# Altium PCB STM32_ESP.pcbdoc
Units mm, origin at the board's own origin, x right, y up, seen from the top; angles counter-clockwise.
Board outline 70 x 50 mm, 2 copper layers (Top Layer, Bottom Layer); 57 components, 37 nets, 195 pads, 2 vias.
Unrouted connection lines stored in the file: 107.
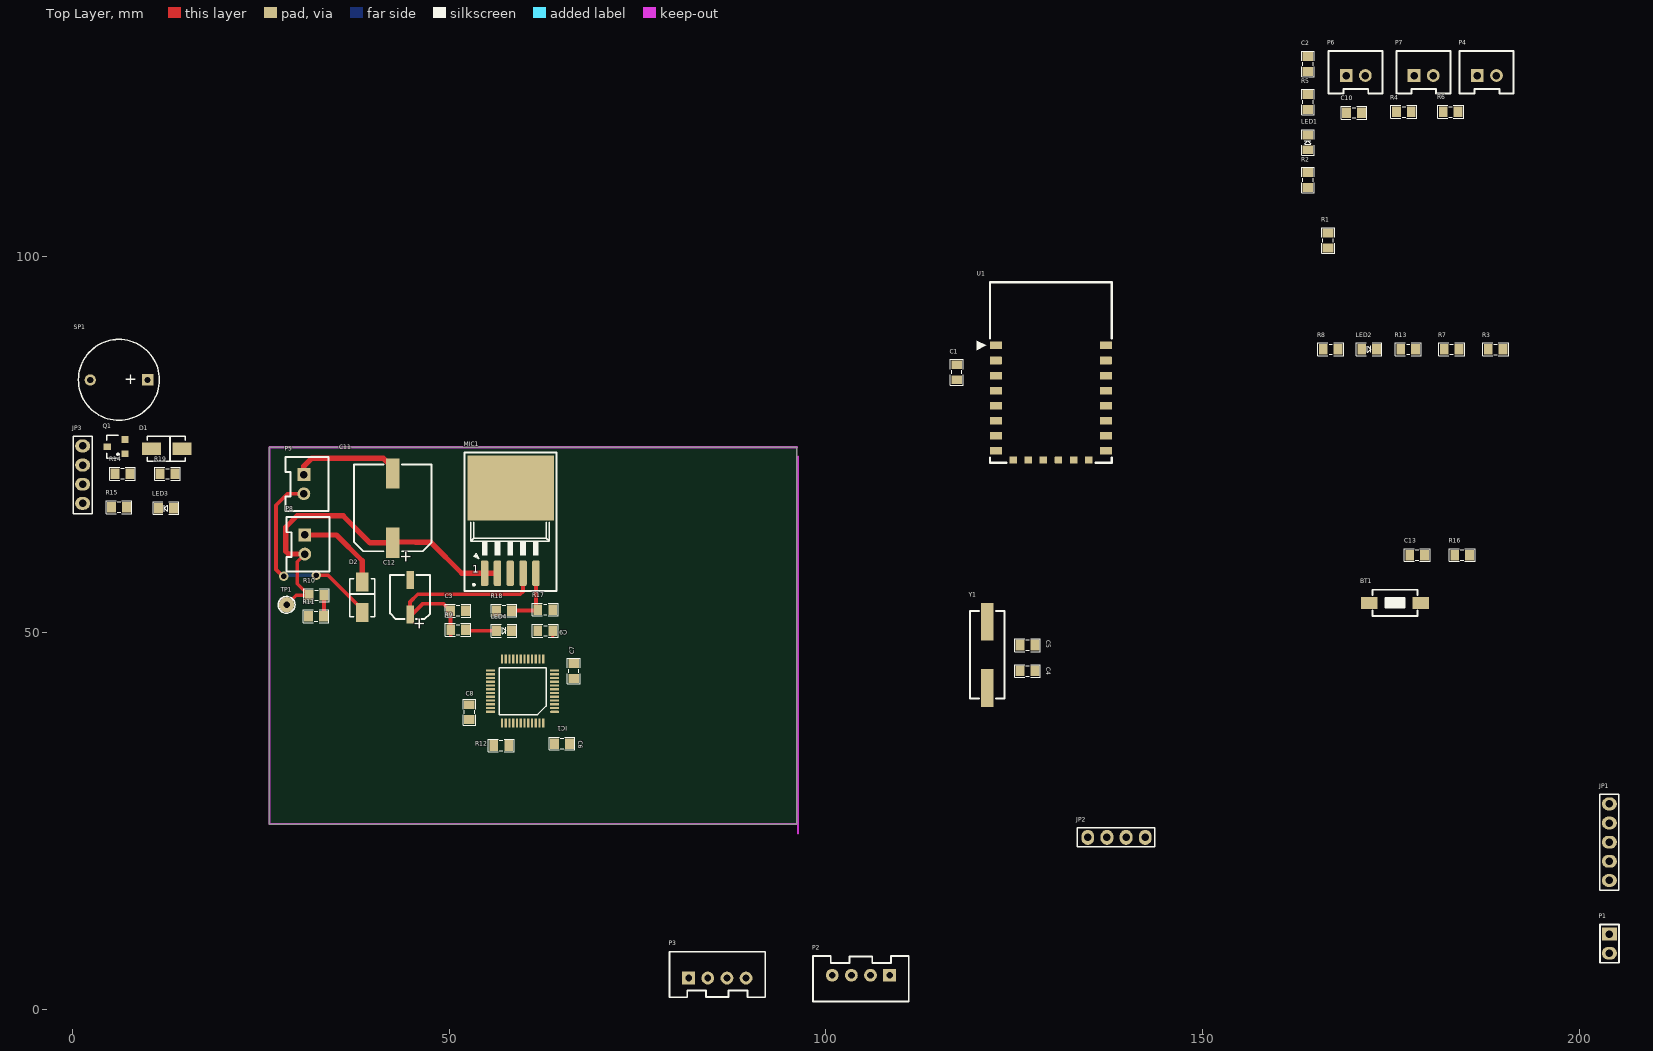
[diagram p0: Top Layer view]
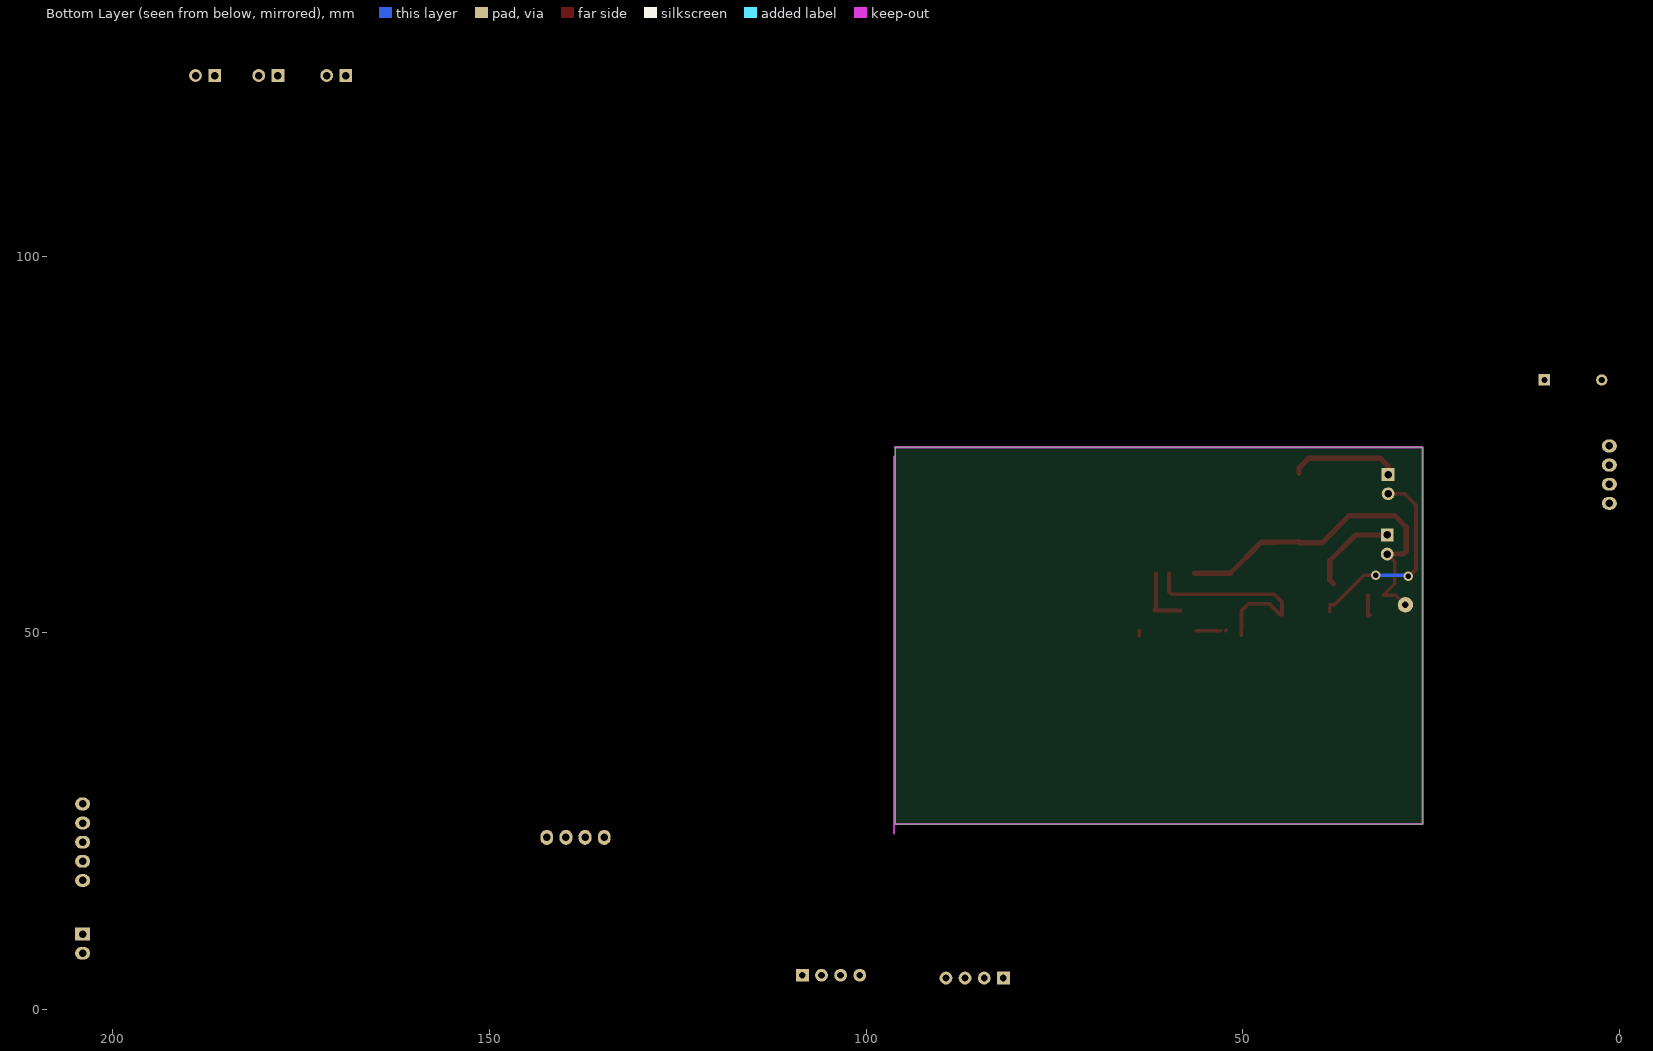
[diagram p1: Bottom Layer view, seen from below]

## Layer stack, top to bottom
Top Solder: solder mask 0.0102, Solder Resist, Dk 3.5
Top Layer: signal copper 0.0356
Dielectric 1: dielectric 0.32, FR-4, Dk 4.8
Bottom Layer: signal copper 0.0356
Bottom Solder: solder mask 0.0102, Solder Resist, Dk 3.5

## Board outline
26.162,24.638 96.162,24.638 96.162,74.638 26.162,74.638

## Design rules (kind name [scope] priority, off if disabled: settings)
Clearance [All] p1: gap=0.254 ignorepadtopadclearanceinfootprint=FALSE except(0.3: Arc-Hole Track-Hole SMDPad-Hole THPad-Hole Via-Hole Fill-Hole Poly-Hole Region-Hole Text-Hole)
PolygonConnect [All] p1: connectstyle=Relief reliefconductorwidth=0.254 reliefentries=4 polygonreliefangle="90 Angle" airgapwidth=0.254
RoutingVias [All] p1: holewidth=0.7 width=1.1 viastyle="Through Hole" minholewidth=0.7 minwidth=1.1 maxholewidth=0.7 maxwidth=1.1
SolderMaskExpansion [All] p1: expansion=0.102
Width [All] p1: maxlimit=0.7 minlimit=0.254 preferedwidth=0.5
30 further rules are at their usual default settings.

## Components (designator, comment, footprint, x,y, rotation, side; value= is the part's Value field where it differs from the comment)
BT1 "Nút Nhấn 2 Chân 3x6x2.5MM SMD" "Nut Nhan 2 Chan SMD_N" 175.514,53.975 r180 top
C1 "100nF" "Tu 0805" 117.348,84.582 r90 top
C2 "100nF" "tu 0805" 163.957,125.476 r90 top
C3 "100nF 16V" "tu 0805" 51.181,52.959 r0 top
C4 "22pF  (0805)" "tu 0805" 126.746,44.958 r0 top
C5 "22pF  (0805)" "tu 0805" 126.746,48.387 r0 top
C6 "100nF" "tu 0805" 64.999,35.306 r180 top
C7 "100nF" "tu 0805" 66.548,44.933 r90 top
C8 "100nF" "tu 0805" 52.705,39.472 r90 top
C9 "100nF" "tu 0805" 62.763,50.292 r0 top
C10 "100nF" "tu 0805" 170.078,118.999 r180 top
C11 "100uF 35V" CAP_ALUM_SMD_100102_TYPE_G 42.545,66.548 r90 top value=330uF/35V
C12 "10uF 16V" CAP_ALUM_SMD_5054_TYPE_C 44.831,54.737 r90 top value=33uF/16V
C13 "100nF" "tu 0805" 178.46,60.325 r180 top
D1 "SS34" DIODE_DO214AC_SMA 12.548,74.422 r0 top
D2 "SS34" DIODE_DO214AC_SMA 38.481,54.737 r90 top
IC1 "STM32F103C8T6" LQFP48 64.008,39.521 r180 top
JP1 "NẠP CODE ESP" "jump don duc 2.54_5p" 203.962,22.225 r270 top
JP2 "2.54_4P" "JUMP DON DUC 2.54_4P" 137.287,22.86 r180 top
JP3 "SHOW" "JUMP DON DUC 2.54_4P" 1.372,69.723 r270 top
LED1 "GREEN" "led 0805" 163.957,115.087 r90 top
LED2 "LED RED" "led 0805" 172.085,87.63 r0 top
LED3 "LED RED" "led 0805" 12.421,66.548 r180 top
LED4 "LED RED" "led 0805" 57.302,50.292 r0 top
MIC1 "MIC29302" Mic5V 57.964,64.441 r180 top
P1 "2P" "Jump don duc 2.54_2P" 203.962,8.763 r270 top
P2 "MAX32100" "Header Duc Thang 4p 2.54" 104.648,4.572 r0 top
P3 "OLED" "Header Duc Thang 4p 2.54" 85.598,4.191 r180 top
P4 "SHOW_I2C" "Header Duc Thang 2P 2.54" 186.436,123.952 r90 top
P5 "PIN 9V" "Header Duc Thang 2P 2.54" 30.734,70.993 r0 top
P6 "RESET" "Header Duc Thang 2P 2.54" 169.037,123.952 r90 top
P7 "CONFIG" "Header Duc Thang 2P 2.54" 178.054,123.952 r90 top
P8 "CÔNG TẮC" "Header Duc Thang 2P 2.54" 30.861,62.992 r0 top
Q1 "C1815" SOT23B 5.817,74.803 r90 top
R1 "10k (0805)" "tro 0805" 166.624,102.108 r90 top
R2 "1.5K" "tro 0805" 163.957,110.109 r90 top
R3 "10k (0805)" "tro 0805" 188.849,87.605 r180 top
R4 "1K" "tro 0805" 176.657,119.126 r180 top
R5 "10K" "tro 0805" 163.957,120.447 r90 top
R6 "10K" "tro 0805" 182.88,119.126 r180 top
R7 "10k (0805)" "tro 0805" 183.058,87.63 r0 top
R8 "1.5K" "tro 0805" 167.005,87.63 r0 top
R9 "1K" "tro 0805" 51.181,50.419 r180 top
R10 "10K" "tro 0805" 32.385,54.991 r180 top
R11 "2K" "tro 0805" 32.385,52.197 r0 top
R12 "10K" "tro 0805" 56.896,35.052 r180 top
R13 "10k (0805)" "tro 0805" 177.292,87.63 r0 top
R14 "10K" "tro 0805" 6.655,71.12 r180 top
R15 "1K" "tro 0805" 6.198,66.675 r180 top
R16 "10k (0805)" "tro 0805" 184.404,60.325 r180 top
R17 "47K" "tro 0805" 62.738,53.086 r180 top
R18 "27K" "tro 0805" 57.277,52.959 r180 top
R19 "1K" "tro 0805" 12.675,71.12 r0 top
SP1 "Còi 3-24V" SPEAKER 10.008,83.566 r180 top
TP1 "TP" TP1 28.448,53.721 r0 top value="Test Point"
U1 "ESP_12_E" ESP8266_12_E_L 129.86,80.538 r0 top
Y1 "8MHz" "thach anh 49s smd" 121.412,47.072 r90 top

## Footprints (in the part's own frame and the unit in brackets; to place one, negate y for a bottom-side part, rotate by r counter-clockwise, add the part's x,y. Pads: shape width x height; smd on the part's side, far side on the other; paste and mask are expansions set on the pad)
CAP_ALUM_SMD_5054_TYPE_C [mm]
  rect 2.4x1 smd: 1(-2.3,0) 2(2.3,0)
  silkscreen extent -2.92,-2.65 2.95,2.67, body extent -2.95,-2.65 2.95,2.65, height 5.41
CAP_ALUM_SMD_100102_TYPE_G [mm]
  rect 4x1.8 smd: 1(-4.6,0) 2(4.6,0)
  silkscreen extent -5.71,-5.15 5.8,5.15, body extent -5.8,-5.15 5.8,5.15, height 10.2
DIODE_DO214AC_SMA [mm] "Diode 2214AC- SMA type"
  rect 2.5x1.7 smd: 1(-2.032,0) 2(2.032,0)
  silkscreen extent -2.59,-1.63 2.46,1.7, body extent -2.53,-1.35 2.47,1.35, height 2.25
ESP8266_12_E_L [mm] "ESP-12 Wi-Fi Module by AI-Thinker"
  rrect10% 1.6x1 smd: 1(-7.3,7.6) 2(-7.3,5.6) 3(-7.3,3.6) 4(-7.3,1.6) 5(-7.3,-0.4) 6(-7.3,-2.4) 7(-7.3,-4.4) 8(-7.3,-6.4) 15(7.3,-6.4) 16(7.3,-4.4) 17(7.3,-2.4) 18(7.3,-0.4) 19(7.3,1.6) 20(7.3,3.6) 21(7.3,5.6) 22(7.3,7.6)
  rrect10% 1x0.9 smd: 9(-5,-7.6) 10(-3,-7.6) 11(-1,-7.6) 12(1,-7.6) 13(3,-7.6) 14(5,-7.6)
  silkscreen extent -9.83,-7.97 8.08,15.97, body extent -8,-8 8,16, height 2.9
"Header Duc Thang 2P 2.54" [mm]
  rect 1.7x1.7 hole 1: 1(0,0)
  round 1.7 hole 1: 2(0,-2.54)
  silkscreen extent -2.41,-4.83 3.25,2.36, body extent -2.47,-4.94 3.33,2.46, height 7
"Header Duc Thang 4p 2.54" [mm]
  rect 1.7x1.7 hole 0.9: 1(3.81,0)
  round 1.7 hole 0.9: 2(1.27,0) 3(-1.27,0) 4(-3.81,0)
  silkscreen extent -6.35,-3.5 6.35,2.54, body extent -6.2,-3.4 6.2,2.35, height 7
"Jump don duc 2.54_2P" [mm]
  rect 1.7x2 hole 1 mask+0.102: 1(-1.27,0)
  oval 1.7x2 hole 1 mask+0.102: 2(1.27,0)
  silkscreen extent -2.54,-1.27 2.54,1.27, body extent -2.54,-1.25 2.54,1.25, height 8.55
"JUMP DON DUC 2.54_4P" [mm]
  oval 1.7x2 hole 1 mask+0.102: 1(-5.08,0) 2(-2.54,0) 3(0,0) 4(2.54,0)
  silkscreen extent -6.35,-1.27 3.94,1.27, body extent -6.32,-1.3 3.84,1.24, height 7.2
"jump don duc 2.54_5p" [mm]
  oval 1.7x2 hole 1 mask+0.102: 1(-5.08,0) 2(-2.54,0) 3(0,0) 4(2.54,0) 5(5.08,0)
  silkscreen extent -6.35,-1.27 6.35,1.27, body extent -6.35,-1.25 6.35,1.25, height 8.55
"led 0805" [mm]
  rect 1.18x1.4 smd: 1(-0.991,0) 2(0.991,0)
  silkscreen extent -1.7,-0.86 1.7,0.84, body extent -1.01,-0.62 1.01,0.63, height 1.1
LQFP48 [mm]
  oval 1.2x0.3 smd: 1(0,0)
  rect 1.2x0.3 smd: 2(0,-0.5) 3(0,-1) 4(0,-1.5) 5(0,-2) 6(0,-2.5) 7(0,-3) 8(0,-3.5) 9(0,-4) 10(0,-4.5) 11(0,-5) 12(0,-5.5) 25(8.5,-5.5) 26(8.5,-5) 27(8.5,-4.5) 28(8.5,-4) 29(8.5,-3.5) 30(8.5,-3) 31(8.5,-2.5) 32(8.5,-2) 33(8.5,-1.5) 34(8.5,-1) 35(8.5,-0.5) 36(8.5,0)
  rect 0.3x1.2 smd: 13(1.5,-7) 14(2,-7) 15(2.5,-7) 16(3,-7) 17(3.5,-7) 18(4,-7) 19(4.5,-7) 20(5,-7) 21(5.5,-7) 22(6,-7) 23(6.5,-7) 24(7,-7) 37(7,1.5) 38(6.5,1.5) 39(6,1.5) 40(5.5,1.5) 41(5,1.5) 42(4.5,1.5) 43(4,1.5) 44(3.5,1.5) 45(3,1.5) 46(2.5,1.5) 47(2,1.5) 48(1.5,1.5)
  silkscreen extent 1.13,-5.86 7.36,0.37, body extent -0.26,-7.24 8.74,1.76, height 1.5
Mic5V [mm] "3A"
  rrect50% 1x3.4 smd: 1(3.248,6.528) 2(1.548,6.528) 4(-1.852,6.528) 5(-3.552,6.528)
  rrect50% 1x3.4 smd mask+0: 3(-0.152,6.528)
  rect 11.5x8.634 smd: 6(-0.202,-4.774)
  silkscreen extent -6.3,-9.49 5.9,8.91, body extent -5.2,-7.24 4.96,7.4, height 4.57
"Nut Nhan 2 Chan SMD_N" [mm] "Switch SMD type"
  rect 2.2x1.6 smd: 1(-3.4,0) 2(3.4,0)
  silkscreen extent -3,-1.75 3,1.75, body extent -3.05,-1.85 3.05,1.85, height 2.5
SOT23B [mm] "SOT 23B"
  rect 0.9x0.95 smd: 1(-1.052,-1.175) 2(0.848,-1.175) 3(-0.102,1.175)
  silkscreen extent -1.63,-0.38 1.4,1.27, body extent -1.6,-1.2 1.4,1.3, height 1.1
SPEAKER [mm]
  rect 1.5x1.5 hole 0.8: 1(0,0)
  round 1.5 hole 0.8: 2(7.62,0.013)
  silkscreen extent -1.55,-5.38 9.18,5.36, body extent -5.67,-6 9.78,6, height 3.99
"thach anh 49s smd" [mm]
  rect 5x1.7 smd mask+0.102: 1(-4.4,0) 2(4.4,0)
  silkscreen extent -5.8,-2.3 5.82,2.3, body extent -6.4,-2.41 6.4,2.42, height 4.4
TP1 [mil] "Test point"
  round 80 hole 35: 1(0,0)
  silkscreen extent -44,-44 44,44, body extent -50,-50 50,50, height 178
"tro 0805" [mm]
  rect 1.18x1.4 smd: 1(-1.016,0) 2(0.965,0)
  silkscreen extent -1.73,-0.86 1.68,0.84, body extent -1.54,-0.7 1.46,0.7, height 0.53
"Tu 0805" [mm] "Compoment SMD 80x50mil"
  rect 1.18x1.4 smd: 1(-0.991,0) 2(0.991,0)
  silkscreen extent -1.7,-0.86 1.7,0.84, body extent -1.01,-0.64 1.01,0.63, height 0.61
"tu 0805" [mm] "Compoment SMD 80x50mil"
  rect 1.18x1.4 smd: 1(-0.991,0) 2(0.991,0)
  silkscreen extent -1.7,-0.86 1.7,0.84, body extent -1.01,-0.64 1.01,0.63, height 0.61

## Part data
BT1: library part "Nut Nhan 2 Chan SMD", "Dán", Chung_Loai=Dán, Don_Vi=Con, Ma_Hang=MH001036, So_Chan=2, Ten_Linh_Kien="Nút Nh?n 2 Chân 3x6x2.5MM SMD"
C1: library part "Tu 0805 106 16V 10%", "Dán", Chung_Loai=Dán, Don_Vi=Con, Ma_Hang=MH004553, So_Chan=2, Ten_Linh_Kien="T? 0805 106-10uF 10% 16V"
C2 C10: library part "Tu 0805 6.8nF 50V 10%", "Dán", Chung_Loai=Dán, Don_Vi=Con, Ma_Hang=MH009987, Ten_Linh_Kien="T? 0805 6.8nF 10% 50V"
C3 C4 C5: library part "Tu 0805 22pF 50V 10%", "Dán", Chung_Loai=Dán, Don_Vi=Con, Ma_Hang=MH004560, So_Chan=2, Ten_Linh_Kien="T? 0805 22P 10% 50V"
C6 C7 C8 C9 C13: library part "Tu 0805 104 50V 10%", "Dán", Chung_Loai=Dán, Don_Vi=Con, Ma_Hang=MH004551, So_Chan=2, Ten_Linh_Kien="T? 0805 104-100nF 10% 50V"
C11: library part EEE-FK1C331P, "CAP ALUM 330uF 20% 35V SMD", MFR=Panasonic, Category=CAPACITOR, MPN=EEE-FK1C331P, PinCount=2, Solder=SMT
C12: library part EEE-FK1C330P, "CAP ALUM 33uF 20% 16V SMD", MFR=Panasonic, Category=CAPACITOR, MPN=EEE-FK1C330P, PinCount=2, Solder=SMT
D1 D2: "DIODE SCHOTTKY 40V 3A SMA", MPN=SS34, Solder=SMT
IC1 Q1: "Dán", Chung_Loai=Dán, Don_Vi=Con
  IC1: Kieu_Chan=LQFP48, Ma_Hang=MH000567, So_Chan=48, Ten_Linh_Kien="STM32F103C8T6 LQFP48"
  Q1: Ma_Hang=MH000946, Ten_Linh_Kien="C1815 SOT23 TRANS NPN 0.15A 50V (SMD-HF)"
JP1: library part "Jump Don Duc 2.54_5P", "C?m", Chung_Loai=C?m, Don_Vi=Con, Ma_Hang=MH000903, So_Chan=5, Ten_Linh_Kien="Jump Ðon Ð?c 2.54MM 2x40P Th?ng 11MM"
JP2 JP3: library part "Jump Don Duc 2.54_4P", "C?m", Chung_Loai=C?m, Don_Vi=Con, So_Chan=4, Ten_Linh_Kien="Jump Ðon Ð?c 2.54MM 2x40P Th?ng 11MM"
LED1: library part "Led 0805 Xanh Duong", "Dán", Chung_Loai=Dán, Don_Vi=Con, Ma_Hang=MH002327, So_Chan=2, Ten_Linh_Kien="LED 0805 Màu Xanh Duong (Blue)"
LED2 LED3 LED4: library part "Led 0805 Do", "Dán", Chung_Loai=Dán, Don_Vi=Con, Ma_Hang=MH000897, So_Chan=2, Ten_Linh_Kien="LED 0805 Màu Ð?"
MIC1: library part Mic5V, "3A"
P1: library part "Jum don duc 2.54_2P", "C?m", Chung_Loai=C?m, Don_Vi=Con, Kieu_Chan="Jump don duc 2.54", Ma_Hang=MH000903, So_Chan=2, Ten_Linh_Kien="Jum don d?c 2.54MM 1X40P Th?ng 11MM"
P2 P3: library part "Header 2.54_4p Duc Thang", "C?m", Chung_Loai=C?m, Don_Vi=Con, Ma_Hang=MH001285, So_Chan=4, Ten_Linh_Kien="Header 4P XH2.54-4P Ð?c Th?ng"
P4 P5 P6 P7 P8: library part "Header 2.54-2p Duc Thang", "C?m", Chung_Loai=C?m, Don_Vi=Con, Ma_Hang=MH001283, So_Chan=2, Ten_Linh_Kien="Header 2P XH2.54-2P Ð?c Th?ng"
R1 R3 R5 R6 R7 R9 R10 R11 R13 R16 R17 R18: library part "Tro 0805 5% 10k", "Dán", Chung_Loai=Dán, Don_Vi=Con, Ma_Hang=MH005239, So_Chan=2, Ten_Linh_Kien="Tr? 0805 5% 10k"
R2 R4 R8 R15: library part "Tro 0805 5% 1.5k", "Dán", Chung_Loai=Dán, Don_Vi=Con, Ma_Hang=MH005232, So_Chan=2, Ten_Linh_Kien="Tr? 0805 5% 1.5k"
R12: library part "Tro 0805 1% 10k", "Dán", Chung_Loai=Dán, Don_Vi=Con, Ma_Hang=MH005473, So_Chan=2, Ten_Linh_Kien="Tr? 0805 1% 10k"
R14 R19: library part "Tro 0805 5% 470R", "Dán", Chung_Loai=Dán, Don_Vi=Con, Ma_Hang=MH005341, So_Chan=2, Ten_Linh_Kien="Tr? 0805 5% 470R"
SP1: library part "Coi Chip 5V", "C?m", Chung_Loai=C?m, Don_Vi=Con, Ma_Hang=MH000902, Ten_Linh_Kien="Còi Chip 5V 9.5x12MM"
TP1: library part TP1, "Test Point"
U1: "ESP-12 Wi-Fi Module by AI-Thinker", IC=ESP8266EX, Vendor=AI-Thinker
Y1: library part "Thach anh 8MHz 49S SMD", "Dán", Chung_Loai=Dán, Don_Vi=Con, Kieu_Chan="49S SMD", Ma_Hang=MH001985, So_Chan=2, Ten_Linh_Kien="Th?ch anh 8MHz 49S SMD"

## Via types
v1: diameter 1.27, hole 0.711, Top Layer to Bottom Layer, 2 vias

## Nets (pads, with @x,y where several pads share a name; then routed paths per layer and width w, separated by ;. In a path a pad name is that pad's centre, name@x,y a point inside that pad or via, vN(x,y) a via of type N, cw(c..) or ccw(c..) an arc to the next point about the centre after c; other vN are vias at no path point)
3V3_ESP: C1.2 C3.1 C6.1 C7.2 C8.1 C9.2 C12.1 IC1.9 IC1.24 IC1.36 IC1.48 JP1.1 JP2.4 JP3.3 JP3.4 MIC1.4 P2.1 P3.2 R1.2 R2.1 R3.2 R5.1 R6.1 R7.2 R8.1 R9.2 R16.2 R17.1 U1.8 | length 29.8
  Top Layer w0.5: R9.2@50.216,49.733 R9.2 50.19,50.444 C3.1 49.301,53.848 46.482,53.848 45.071,52.437 C12.1 44.831,54.102 45.847,55.118 59.436,55.118 59.816,55.498 MIC1.4 ; C9.2@63.754,49.657 C9.2
ADC_SOLAR: IC1.13 R10.1 R11.2 | length 2.9
  Top Layer w0.5: R11.2@33.147,52.4 R11.2 ; R11.2@33.401,52.4 R10.1
BUZZ: IC1.12 R19.2
CONFIG: P7.2 R4.1 R6.2 U1.5
EN: R1.1 U1.3
GND: BT1.2 C1.1 C2.2 C3.2 C4.1 C5.1 C6.2 C7.1 C8.2 C9.1 C10.2 C11.2 C12.2 C13.2 IC1.8 IC1.23 IC1.35 IC1.47 JP1.2 JP1.5 JP2.3 JP3.1 LED2.2 LED3.2 LED4.2 MIC1.3 P1.1 P2.2 P3.1 P5.1 P6.1 P7.1 Q1.1 R11.1 R12.2 R13.1 R14.1 R18.2 U1.15 | length 14.6
  Top Layer w0.7: P5.1 30.734,72.136 31.75,73.152 41.275,73.152 42.545,71.882 C11.2
GPIO0: P1.2 R3.1 U1.18
GPIO2: R7.1 U1.17
GPIO15: R13.2 U1.16
LED_ESP: LED1.2 U1.4
LED_STM: IC1.14 R15.1
NetC10_1: C10.1 R4.2
NetD1_1: D1.1 Q1.2 SP1.2
NetD2_1: D2.1 P5.2 | length 27
  Top Layer w0.5: v1(28.067,57.531) 28.067,57.404 27.051,58.42 27.051,66.929 28.575,68.453 P5.2 ; v1(32.385,57.658) 33.909,57.658 37.846,53.721 D2.1@38.481,53.721 ; D2.1@38.481,52.831 D2.1@38.481,53.34
  Bottom Layer w0.5: v1(28.067,57.531) 28.194,57.658 v1(32.385,57.658)
NetD2_2: D2.2 P8.1 | length 12.3
  Top Layer w0.7: P8.1 35.052,62.992 38.481,59.563 38.481,57.023 D2.2@37.973,56.515
NetIC1_44: IC1.44 R12.1
NetLED1_1: LED1.1 R2.2
NetLED2_1: LED2.1 R8.2
NetLED3_1: LED3.1 R15.2
NetLED4_1: LED4.1 R9.1 | length 3.4
  Top Layer w0.5: R9.1 R9.1@52.324,50.292 ; 52.959,50.292 LED4.1@56.185,50.292
NetMIC1_5: MIC1.5 R17.2 R18.1 | length 8.4
  Top Layer w0.5: R18.1 R17.2@61.773,52.959 ; MIC1.5 61.516,53.343 R17.2
NetQ1_3: Q1.3 R14.2 R19.1
OSC_IN: C5.2 IC1.5 Y1.2
OSC_OUT: C4.2 IC1.6 Y1.1
RST: C2.1 P6.2 R5.2 U1.1
RST_STM: BT1.1 C13.1 IC1.7 R16.1
RX_SOFTWARE: IC1.30 U1.6
RXD: JP1.4 U1.21
SCL: IC1.42 P2.3 P3.3
SCL_ESP: P4.1 U1.20
SDA: IC1.43 P2.4 P3.4
SDA_ESP: P4.2 U1.19
SWCLK: IC1.37 JP2.1
SWDIO: IC1.34 JP2.2
TX_SOFTWARE: IC1.31 U1.7
TXD: JP1.3 U1.22
VIN: C11.1 D1.2 MIC1.1 MIC1.2 P8.2 R10.2 SP1.1 TP1.1 | length 47.6
  Top Layer w0.5: TP1.1 29.718,54.991 R10.2@31.369,54.991 ; P8.2 29.845,59.436 29.845,56.515 R10.2@31.242,55.118
  Top Layer w0.7: P8.2 28.702,60.452 28.321,60.833 28.321,64.008 29.845,65.532 35.941,65.532 39.525,61.948 C11.1 ; C11.1@42.545,62.075 42.548,62.075 45.556,62.013 47.588,62.013 51.688,57.913 MIC1.1 MIC1.2
pads on no net: IC1.1 IC1.2 IC1.3 IC1.4 IC1.10 IC1.11 IC1.15 IC1.16 IC1.17 IC1.18 IC1.19 IC1.20 IC1.21 IC1.22 IC1.25 IC1.26 IC1.27 IC1.28 IC1.29 IC1.32 IC1.33 IC1.38 IC1.39 IC1.40 IC1.41 IC1.45 IC1.46 JP3.2 MIC1.6 U1.2 U1.9 U1.10 U1.11 U1.12 U1.13 U1.14

## Keep-outs
Keep-Out Layer:
  lines w0.3: 96.162,24.638 26.162,24.638 26.162,74.638 96.162,74.638 ; 96.289,23.368 96.289,73.368

## Text inside footprints (layer, text, board x,y; h text height)
C11: Top Overlay "+" at 44.894,59.24 h1.52 r90
C12: Top Overlay "+" at 46.731,50.337 h1.52 r90
MIC1: Top Overlay "1" at 53.091,57.964 h1
SP1: Top Overlay "+" at 8.598,84.277 h1.52 r180
U1: Mechanical 13 "CUTOUT POLYGON" at 123.359,95.453 h0.25; Mechanical 13 "ANTENNA AREA" at 123.359,95.961 h0.25